# Altium PCB main_pcb.PcbDoc
Units mm, origin at the board's own origin, x right, y up, seen from the top; angles counter-clockwise.
Board outline 20 x 50 mm, 2 copper layers (Top Layer, Bottom Layer); 44 components, 28 nets, 160 pads, 32 vias.
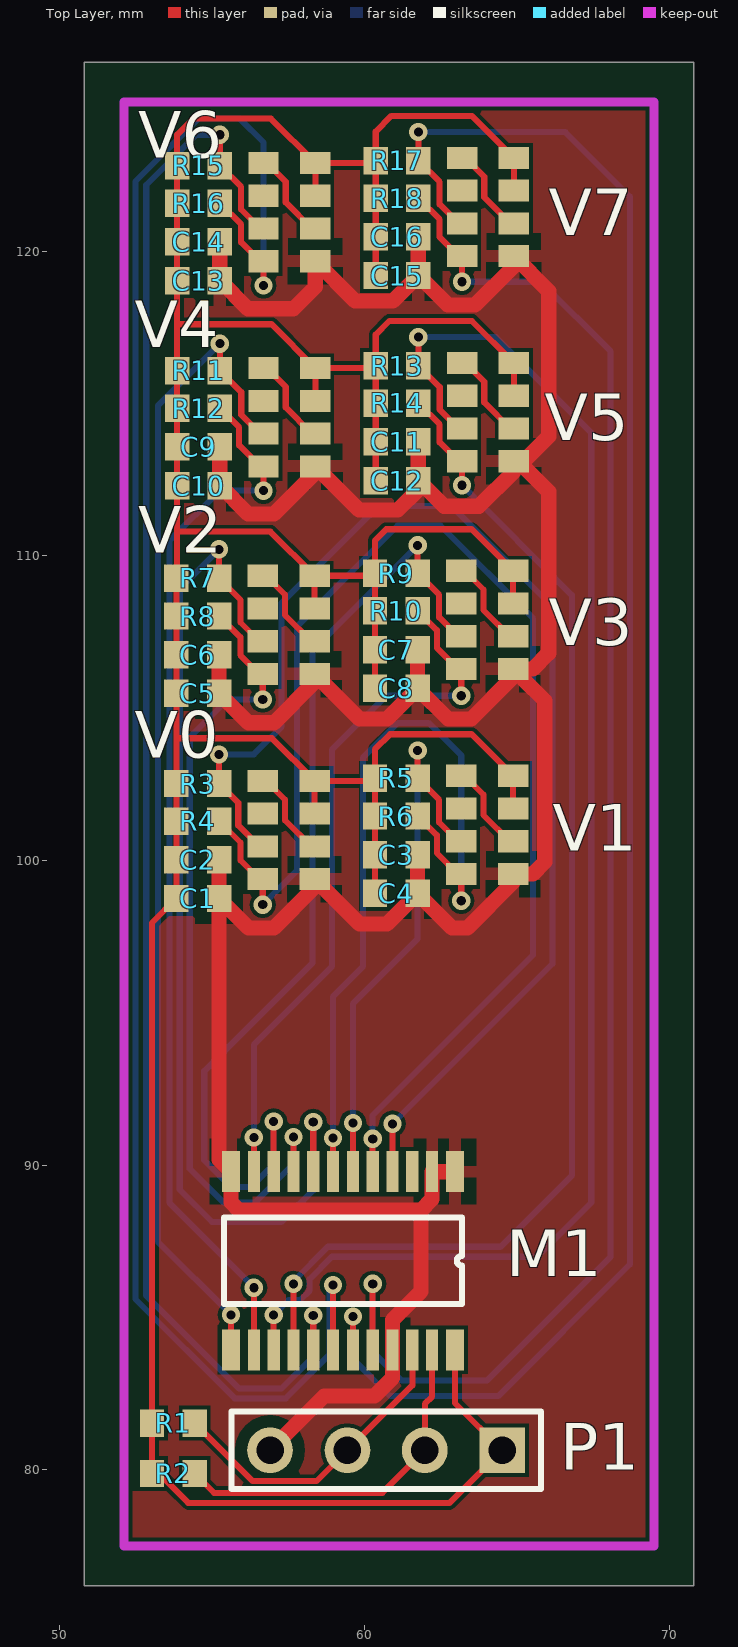
[diagram p0: Top Layer view]
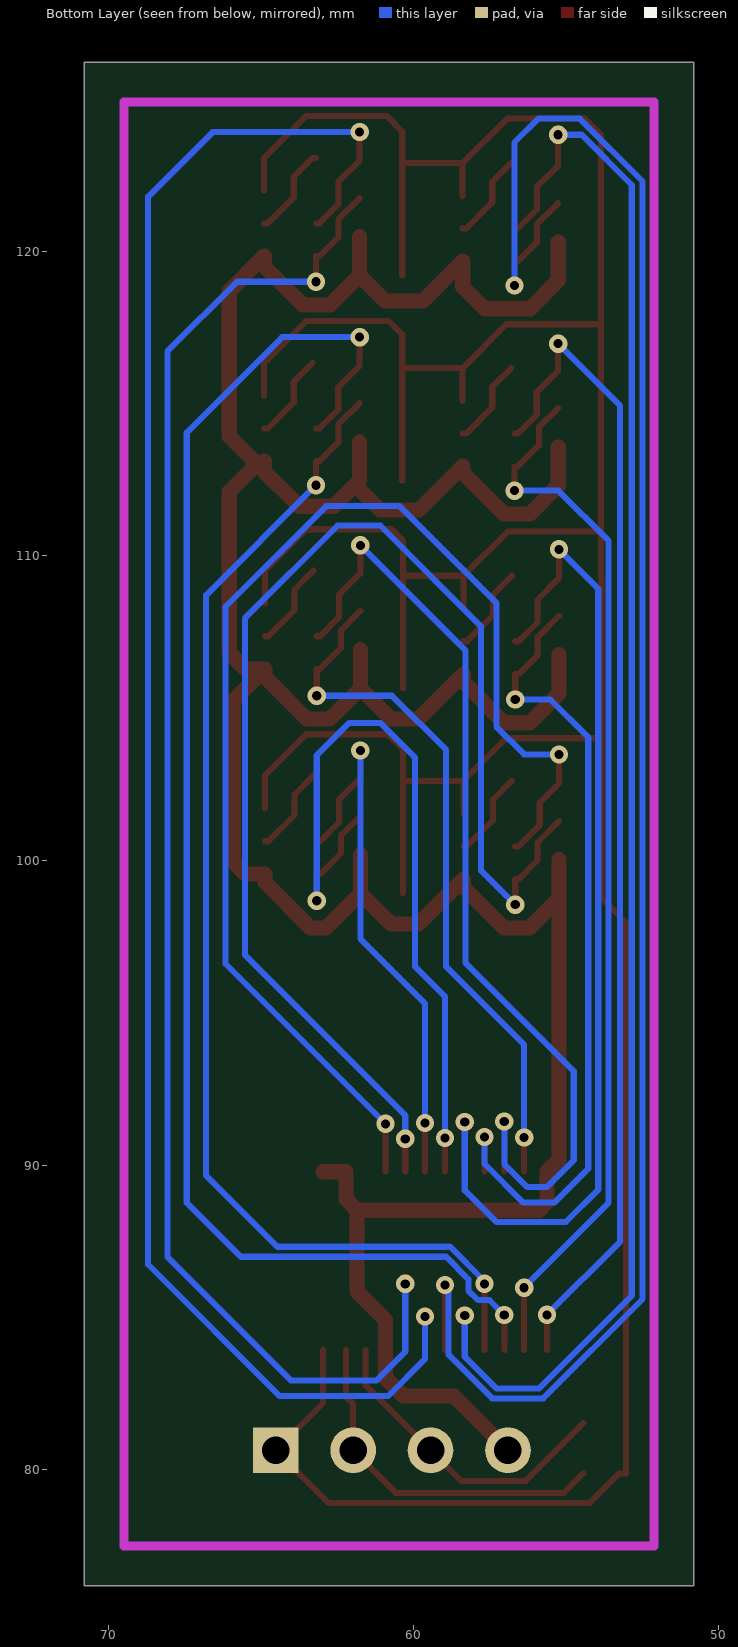
[diagram p1: Bottom Layer view, seen from below]

## Layer stack, top to bottom
Top Solder: solder mask 0.0102, Solder Resist, Dk 3.5
Top Layer: signal copper 0.0356
Dielectric 1: dielectric 0.32, FR-4, Dk 4.8
Bottom Layer: signal copper 0.0356
Bottom Solder: solder mask 0.0102, Solder Resist, Dk 3.5

## Board outline
50.8,76.2 70.8,76.2 70.8,126.2 50.8,126.2

## Design rules (kind name [scope] priority, off if disabled: settings)
Clearance [All] p1: gap=0.13
FabricationTestPointUsage TestPointUsage [All] p1: valid=0 allowmultiple=FALSE
FabricationTestpoint Testpoint [All] p1: side=3 testpointundercomponent=TRUE minsize=1.016 maxsize=2.54 preferedsize=1.524 minholesize=0 maxholesize=1.016 preferedholesize=0.813 testpointgrid=0.025 allowsidetop=TRUE allowsidebottom=TRUE usegrid=TRUE gridtolerance=0
HoleSize [All] p1: absolutevalues=TRUE maxlimit=3.9 minlimit=0.2 maxpercent=80.000 minpercent=20.000
HoleToHoleClearance [All] p1: gap=0.3 allowstackedmicrovias=TRUE
MinimumSolderMaskSliver [All] p1: minsoldermaskwidth=0.1
PlaneConnect [All] p1: planeconnectstyle=Relief reliefexpansion=0.5 reliefentries=4 reliefconductorwidth=0.4 reliefairgap=0.4
PolygonConnect [All] p1: connectstyle=Relief reliefconductorwidth=0.4 reliefentries=4 polygonreliefangle="90 Angle" airgapwidth=0.4
RoutingVias [All] p1: holewidth=0.3 width=0.6 viastyle="Through Hole" minholewidth=0.3 minwidth=0.6 maxholewidth=0.3 maxwidth=0.6
SilkToBoardRegionClearance UnpouredPolygon [All] p2:
SilkToSilkClearance [All] p1: silktosilkclearance=0
SilkToSolderMaskClearance SilkscreenOverComponentPads [IsPad] p1: minsilkscreentomaskgap=0 clearancetoexposedcopper=TRUE
SolderMaskExpansion [All] p1: expansion=-0.01
Width Power_Width [(InNet('5V') OR InNet('3V3') OR InNet('VCC') OR InNet('GND'))] p1: maxlimit=1 minlimit=0.4 preferedwidth=0.5 minimp=50.000000 maximp=50.000000 favimp=50.000000
Width [All] p2: maxlimit=0.2 minlimit=0.2 preferedwidth=0.2 minimp=50.000000 maximp=50.000000 favimp=50.000000
21 further rules are at their usual default settings.

## Components (designator, comment, footprint, x,y, rotation, side; value= is the part's Value field where it differs from the comment)
C1 "Cap" 1608[0603] 54.523,98.756 r180 top
C2 "Cap" 1608[0603] 54.523,100.026 r180 top
C3 "Cap" 1608[0603] 61.039,100.193 r180 top
C4 "Cap" 1608[0603] 61.039,98.923 r180 top
C5 "Cap" 1608[0603] 54.523,105.487 r180 top
C6 "Cap" 1608[0603] 54.523,106.757 r180 top
C7 "Cap" 1608[0603] 61.039,106.924 r180 top
C8 "Cap" 1608[0603] 61.039,105.654 r180 top
C9 "Cap" 1608[0603] 54.548,113.576 r180 top
C10 "Cap" 1608[0603] 54.548,112.306 r180 top
C11 "Cap" 1608[0603] 61.064,113.742 r180 top
C12 "Cap" 1608[0603] 61.064,112.472 r180 top
C13 "Cap" 1608[0603] 54.548,119.037 r180 top
C14 "Cap" 1608[0603] 54.548,120.307 r180 top
C15 "Cap" 1608[0603] 61.064,119.203 r180 top
C16 "Cap" 1608[0603] 61.064,120.473 r180 top
M1 "PCA9547" TSSOP24 62.865,89.789 r270 top
P1 "Header 4" HDR1X4 64.516,80.645 r180 top
R1 "Res1" 1608[0603] 53.721,81.534 r180 top
R2 "Res1" 1608[0603] 53.721,79.883 r180 top
R3 "Res1" 1608[0603] 54.523,102.529 r180 top
R4 "Res1" 1608[0603] 54.523,101.296 r180 top
R5 "Res1" 1608[0603] 61.039,102.695 r180 top
R6 "Res1" 1608[0603] 61.039,101.463 r180 top
R7 "Res1" 1608[0603] 54.523,109.26 r180 top
R8 "Res1" 1608[0603] 54.523,108.027 r180 top
R9 "Res1" 1608[0603] 61.039,109.426 r180 top
R10 "Res1" 1608[0603] 61.039,108.194 r180 top
R11 "Res1" 1608[0603] 54.548,116.078 r0 top
R12 "Res1" 1608[0603] 54.548,114.845 r0 top
R13 "Res1" 1608[0603] 61.064,116.245 r180 top
R14 "Res1" 1608[0603] 61.064,115.012 r180 top
R15 "Res1" 1608[0603] 54.548,122.809 r0 top
R16 "Res1" 1608[0603] 54.548,121.576 r0 top
R17 "Res1" 1608[0603] 61.064,122.975 r0 top
R18 "Res1" 1608[0603] 61.064,121.743 r0 top
V0 "VCNL4040" SOP8 58.206,99.391 r180 top
V1 "VCNL4040" SOP8 64.722,99.558 r180 top
V2 "VCNL4040" SOP8 58.206,106.122 r180 top
V3 "VCNL4040" SOP8 64.722,106.289 r180 top
V4 "VCNL4040" SOP8 58.231,112.941 r180 top
V5 "VCNL4040" SOP8 64.747,113.107 r180 top
V6 "VCNL4040" SOP8 58.231,119.672 r180 top
V7 "VCNL4040" SOP8 64.747,119.838 r180 top

## Footprints (in the part's own frame and the unit in brackets; to place one, negate y for a bottom-side part, rotate by r counter-clockwise, add the part's x,y. Pads: shape width x height; smd on the part's side, far side on the other; paste and mask are expansions set on the pad)
1608[0603] [mm] "Chip Capacitor, Body 1.6x0.8mm, IPC High Density"
  rect 0.8x0.9 smd: 1(-0.7,0) 2(0.7,0)
  body extent -0.87,-0.48 0.87,0.48, height 1.3
HDR1X4 [mm] "Connector; Header; 4 Position"
  rect 1.5x1.5 hole 0.9: 1(0,0)
  round 1.5 hole 0.9: 2(2.54,0) 3(5.08,0) 4(7.62,0)
  silkscreen extent -1.27,-1.27 8.89,1.27
SOP8 [mm]
  rect 1x0.725 smd: 1(-0.15,0) 2(-0.15,-1.075) 3(-0.15,-2.15) 4(-0.15,-3.225) 5(1.55,-3.225) 6(1.55,-2.15) 7(1.55,-1.075) 8(1.55,0)
TSSOP24 [mm]
  rect 1.35x0.6 smd: 1(0,0.1) 12(0,-7.25) 13(5.85,-7.25) 24(5.85,0.1)
  rect 1.35x0.4 smd: 2(0,-0.65) 3(0,-1.3) 4(0,-1.95) 5(0,-2.6) 6(0,-3.25) 7(0,-3.9) 8(0,-4.55) 9(0,-5.2) 10(0,-5.85) 11(0,-6.5) 14(5.85,-6.5) 15(5.85,-5.85) 16(5.85,-5.2) 17(5.85,-4.55) 18(5.85,-3.9) 19(5.85,-3.25) 20(5.85,-2.6) 21(5.85,-1.95) 22(5.85,-1.3) 23(5.85,-0.65)
  silkscreen extent 1.51,-7.48 4.34,0.33

## Part data
C1 C2 C3 C4 C5 C6 C7 C8 C9 C10 C11 C12 C13 C14 C15 C16: "Capacitor"
P1: "Header, 4-Pin"
R1 R2 R3 R4 R5 R6 R7 R8 R9 R10 R11 R12 R13 R14 R15 R16 R17 R18: "Resistor"
V0 V1 V2 V3 V4 V5 V6 V7: library part Component_1

## Via types
v1: diameter 0.6, hole 0.3, Top Layer to Bottom Layer, 32 vias

## Nets (pads, with @x,y where several pads share a name; then routed paths per layer and width w, separated by ;. In a path a pad name is that pad's centre, name@x,y a point inside that pad or via, vN(x,y) a via of type N, cw(c..) or ccw(c..) an arc to the next point about the centre after c; other vN are vias at no path point)
GND: C1.1 C2.1 C3.1 C4.1 C5.1 C6.1 C7.1 C8.1 C9.1 C10.1 C11.1 C12.1 C13.1 C14.1 C15.1 C16.1 M1.1 M1.2 M1.12 M1.21 P1.4 V0.1 V1.1 V2.1 V3.1 V4.1 V5.1 V6.1 V7.1 | length 115.5
  Top Layer w0.254: C12.1@61.764,112.183 C12.1
  Top Layer w0.5: C2.1 C1.1 ; C6.1 C5.1 56.189,104.521 57.023,104.521 58.356,105.854 V2.1 59.83,104.648 60.734,104.648 C8.1 ; C9.1 C10.1 56.175,111.379 57.023,111.379 58.381,112.737 V4.1 59.816,111.506 61.087,111.506 C12.1@61.764,112.183 ; C14.1 C13.1 56.175,118.11 57.658,118.11 58.381,118.833 V6.1 59.689,118.364 60.925,118.364 C15.1 ; P1.4 58.674,82.423 60.325,82.423 60.915,83.013 M1.21 60.915,84.918 61.849,85.852 61.849,88.519 ; C3.1 C4.1 ; C7.1 C8.1 ; C11.1 C12.1 62.603,111.633 63.754,111.633 64.897,112.776 V5.1 ; C16.1 C15.1 ; M1.1 M1.2 62.215,88.885 61.849,88.519 ; V1.1 64.872,99.289 63.373,97.79 62.872,97.79 C4.1 ; V1.1@65.023,99.558 65.522,99.558 65.913,99.949 65.913,105.248 V3.1@65.197,105.964 ; C1.1 56.189,97.79 57.023,97.79 58.356,99.123 V0.1 59.83,97.917 60.734,97.917 C4.1 ; C1.1 55.223,90.181 M1.12 55.615,88.784 55.88,88.519 61.849,88.519 ; C8.1 62.745,104.648 63.5,104.648 64.872,106.02 V3.1 65.522,106.289 66.04,106.807 66.04,112.115 65.138,113.017 66.04,113.919 66.04,118.695 V7.1 64.897,119.507 63.627,118.237 62.73,118.237 C15.1
NetC1_2: C1.2 C2.2 C3.2 C4.2 C5.2 C6.2 C7.2 C8.2 C9.2 C10.2 C11.2 C12.2 C13.2 C14.2 C15.2 C16.2 M1.24 P1.1 R1.2 R2.2 R3.2 R4.2 R5.2 R6.2 R7.2 R8.2 R9.2 R10.2 R11.1 R12.1 R13.2 R14.2 R15.1 R16.1 R17.1 R18.1 V0.3 V0.4 V1.3 V1.4 V2.3 V2.4 V3.3 V3.4 V4.3 V4.4 V5.3 V5.4 V6.3 V6.4 V7.3 V7.4 | length 138
  Top Layer w0.2: 53.823,104.013 56.959,104.013 V0.4 ; V0.3 V0.4 ; V2.3 V2.4 ; V4.3 V4.4 ; V6.3 V6.4 ; R5.2@60.26,102.616 V0.4 ; R9.2@60.26,109.347 V2.4 ; R13.2@60.285,116.166 V4.4 ; R17.1@60.285,122.897 V6.4 ; C4.2 C3.2 R6.2 R5.2 60.339,103.646 60.838,104.145 63.51,104.145 V1.4 V1.3 ; C8.2 C7.2 R10.2 R9.2 60.339,110.504 60.711,110.876 63.51,110.876 V3.4 V3.3 ; C12.2 C11.2 R14.2 R13.2 60.364,117.26 60.813,117.709 63.52,117.709 V5.4 V5.3 ; C15.2 C16.2 R18.1 R17.1 60.364,123.924 60.88,124.44 63.52,124.44 V7.4 V7.3 ; M1.24 62.965,82.196 P1.1 62.789,78.918 54.211,78.918 53.246,79.883 R2.2 R1.2 53.021,97.954 C1.2 C2.2 R4.2 R3.2 53.823,104.013 C5.2 C6.2 R8.2 R7.2 53.848,109.284 53.848,110.795 ; 53.848,110.795 56.908,110.795 V2.4 ; 53.848,110.795 C10.2 C9.2 R12.1 R11.1 53.848,117.602 ; 53.848,117.602 56.945,117.602 V4.4 ; 53.848,117.602 C13.2 C14.2 R16.1 R15.1 53.848,123.825 54.375,124.352 56.926,124.352 V6.4
NetM1_4: M1.4 R3.1 V0.7 | length 42.5
  Top Layer w0.2: v1(55.223,103.483) R3.1 55.853,101.898 55.853,101.156 56.543,100.466 V0.7 ; M1.4 v1(60.915,91.358)
  Bottom Layer w0.2: v1(55.223,103.483) 56.366,103.483 57.277,104.394 57.277,108.458 60.452,111.633 62.865,111.633 66.167,108.331 66.167,96.61 v1(60.915,91.358)
NetM1_5: M1.5 R4.1 V0.8 | length 43.7
  Top Layer w0.2: R4.1 55.926,100.593 55.926,100.008 56.543,99.391 V0.8 v1(56.656,98.552) ; M1.5 v1(60.265,90.865)
  Bottom Layer w0.2: v1(56.656,98.552) 57.785,99.681 57.785,107.696 61.087,110.998 62.484,110.998 65.532,107.95 65.532,96.901 60.265,91.634 v1(60.265,90.865)
NetM1_6: M1.6 R5.1 V1.7 | length 18.3
  Top Layer w0.2: M1.6 v1(59.615,91.388) ; v1(61.739,103.615) R5.1 62.442,101.992 62.442,101.25 63.059,100.633 V1.7
  Bottom Layer w0.2: v1(59.615,91.388) 59.615,95.302 61.739,97.426 v1(61.739,103.615)
NetM1_7: M1.7 R6.1 V1.8 | length 26.4
  Top Layer w0.2: M1.7 v1(58.965,90.895) ; R6.1@61.739,101.46 62.369,100.83 62.369,100.248 63.059,99.558 V1.8 v1(63.172,98.679)
  Bottom Layer w0.2: v1(58.965,90.895) 58.965,95.541 59.944,96.52 59.944,103.378 61.087,104.521 62.103,104.521 63.172,103.452 v1(63.172,98.679)
NetM1_8: M1.8 R7.1 V2.7 | length 34.4
  Top Layer w0.2: v1(55.223,110.214) R7.1 55.926,108.557 55.926,107.814 56.543,107.197 V2.7 ; M1.8 v1(58.315,91.418)
  Bottom Layer w0.2: v1(55.223,110.214) 53.931,108.922 53.931,89.198 54.991,88.138 57.277,88.138 58.315,89.176 v1(58.315,91.418)
NetM1_9: M1.9 R8.1 V2.8 | length 26.9
  Top Layer w0.2: R8.1 55.92,107.33 55.92,106.745 56.543,106.122 V2.8 v1(56.656,105.283) ; M1.9 v1(57.665,90.925)
  Bottom Layer w0.2: v1(56.656,105.283) 55.499,105.283 54.261,104.045 54.261,89.884 55.372,88.773 56.388,88.773 57.665,90.05 v1(57.665,90.925)
NetM1_10: M1.10 R9.1 V3.7 | length 32.7
  Top Layer w0.2: M1.10 v1(57.015,91.432) ; v1(61.739,110.346) R9.1 62.442,108.723 62.442,107.981 63.059,107.364 V3.7
  Bottom Layer w0.2: v1(57.015,91.432) 57.015,90.035 56.261,89.281 55.626,89.281 54.737,90.17 54.737,93.091 58.293,96.647 58.293,106.9 v1(61.739,110.346)
NetM1_11: M1.11 R10.1 V3.8 | length 23.3
  Top Layer w0.2: M1.11 v1(56.365,90.909) ; R10.1 62.369,107.564 62.369,106.979 63.059,106.289 V3.8 v1(63.172,105.41)
  Bottom Layer w0.2: v1(56.365,90.909) 56.365,93.957 58.928,96.52 58.928,103.632 60.706,105.41 v1(63.172,105.41)
NetM1_13: M1.13 R11.2 V4.7 | length 38.5
  Top Layer w0.2: v1(55.248,116.967) R11.2 55.951,115.375 55.951,114.633 56.568,114.016 V4.7 ; M1.13 v1(55.615,85.09)
  Bottom Layer w0.2: v1(55.248,116.967) 53.213,114.932 53.213,87.492 v1(55.615,85.09)
NetM1_14: M1.14 R12.2 V4.8 | length 34.8
  Top Layer w0.2: R12.2 55.878,114.215 55.878,113.631 56.568,112.941 V4.8 v1(56.681,112.141) ; M1.14 v1(56.365,85.979)
  Bottom Layer w0.2: v1@56.365,86.002 53.594,88.773 53.594,110.49 55.245,112.141 v1(56.681,112.141)
NetM1_15: M1.15 R13.1 V5.7 | length 49.2
  Top Layer w0.2: M1.15 v1(57.015,85.082) ; v1(61.764,117.179) R13.1 62.467,115.541 62.467,114.799 63.084,114.182 V5.7
  Bottom Layer w0.2: v1(57.015,85.082) 57.509,85.576 57.885,85.576 58.195,85.886 58.195,86.262 58.928,86.995 65.659,86.995 67.437,88.773 67.437,114.046 64.304,117.179 v1(61.764,117.179)
NetM1_16: M1.16 R14.1 V5.8 | length 40.2
  Top Layer w0.2: M1.16 v1(57.665,86.106) ; R14.1 62.461,114.315 62.461,113.73 63.084,113.107 V5.8 v1(63.197,112.317)
  Bottom Layer w0.2: v1@57.665,86.199 58.791,87.325 64.465,87.325 66.802,89.662 66.802,108.712 v1(63.197,112.317)
NetM1_17: M1.17 R15.2 V6.7 | length 52.9
  Top Layer w0.2: v1(55.248,123.822) R15.2 55.945,122.112 55.945,121.37 56.568,120.747 V6.7 ; M1.17 v1(58.315,85.068)
  Bottom Layer w0.2: v1(55.248,123.822) 54.48,123.822 52.832,122.174 52.832,85.719 55.874,82.677 57.277,82.677 58.315,83.715 v1(58.315,85.068)
NetM1_18: M1.18 R16.2 V6.8 | length 62.9
  Top Layer w0.2: R16.2 55.945,120.879 55.945,120.295 56.568,119.672 V6.8 v1(56.681,118.872) ; M1.18 v1(58.965,86.069)
  Bottom Layer w0.2: v1(56.681,118.872) 56.681,123.57 55.899,124.352 54.54,124.352 52.48,122.292 52.48,85.604 55.737,82.347 57.414,82.347 58.845,83.778 v1@58.845,86.069
NetM1_19: M1.19 R17.2 V7.7 | length 60.4
  Top Layer w0.2: M1.19 v1(59.615,85.038) ; v1(61.764,123.91) R17.2 62.461,122.279 62.461,121.536 63.084,120.913 V7.7
  Bottom Layer w0.2: v1(59.615,85.038) 59.615,83.641 60.833,82.423 64.389,82.423 68.707,86.741 68.707,121.793 66.59,123.91 v1(61.764,123.91)
NetM1_20: M1.20 R18.2 V7.8 | length 53.2
  Top Layer w0.2: M1.20 v1(60.265,86.106) ; R18.2 62.461,121.046 62.461,120.461 63.084,119.838 V7.8 v1(63.197,118.999)
  Bottom Layer w0.2: v1(60.265,86.106) 60.265,83.88 61.214,82.931 64.008,82.931 68.072,86.995 68.072,116.713 65.786,118.999 v1(63.197,118.999)
NetM1_22: M1.22 P1.3 R1.1 | length 10.4
  Top Layer w0.2: R1.1 56.326,79.629 58.42,79.629 P1.3 61.565,82.774 M1.22
NetM1_23: M1.23 P1.2 R2.1 | length 11.8
  Top Layer w0.2: R2.1 55.056,79.248 60.579,79.248 P1.2 61.976,82.169 62.215,82.408 M1.23
NetV0_2: V0.2 V0.5 | length 2.9
  Top Layer w0.2: V0.5@56.769,102.616 57.386,101.999 57.386,101.323 58.243,100.466 V0.2
NetV1_2: V1.2 V1.5 | length 3
  Top Layer w0.2: V1.5 63.285,102.783 63.902,102.165 63.902,101.49 64.759,100.633 V1.2
NetV2_2: V2.2 V2.5 | length 2.9
  Top Layer w0.2: V2.5@56.769,109.347 57.386,108.73 57.386,108.054 58.243,107.197 V2.2
NetV3_2: V3.2 V3.5 | length 2.9
  Top Layer w0.2: V3.5@63.285,109.514 63.902,108.896 63.902,108.221 64.759,107.364 V3.2
NetV4_2: V4.2 V4.5 | length 2.9
  Top Layer w0.2: V4.5@56.794,116.166 57.411,115.548 57.411,114.873 58.268,114.016 V4.2
NetV5_2: V5.2 V5.5 | length 2.9
  Top Layer w0.2: V5.5@63.31,116.332 63.927,115.715 63.927,115.039 64.784,114.182 V5.2
NetV6_2: V6.2 V6.5 | length 2.9
  Top Layer w0.2: V6.5@56.794,122.897 57.411,122.279 57.411,121.604 58.268,120.747 V6.2
NetV7_2: V7.2 V7.5 | length 3
  Top Layer w0.2: V7.5 63.31,123.063 63.927,122.446 63.927,121.77 64.784,120.913 V7.2
pads on no net: M1.3 V0.6 V1.6 V2.6 V3.6 V4.6 V5.6 V6.6 V7.6

## Polygon pours and split planes (outlines as drawn)
GND on Top Layer "Top Layer-No Net" (solid, remove dead copper, pour order 2): 52.1,124.714 52.286,124.9 69.5,124.9 69.5,77.5 52.1,77.5

## Keep-outs
Keep-Out Layer:
  lines w0.3: 52.1,77.5 69.5,77.5 69.5,124.9 52.1,124.9 52.1,77.5

## Silkscreen, mask and mechanical layers (free items; w line width, h text height)
Drill Drawing:
  text ".LEGEND" at 75.88,81.28 h1.52
  text "Drill Drawing." at 75.88,78.74 h1.52

## Dimensions
52.1,77.5 to 69.5,77.5 on Mechanical 1
52.1,77.5 to 52.1,124.9 on Mechanical 1